# EAGLE board 1_TRYY (EAGLE 8.5.0)
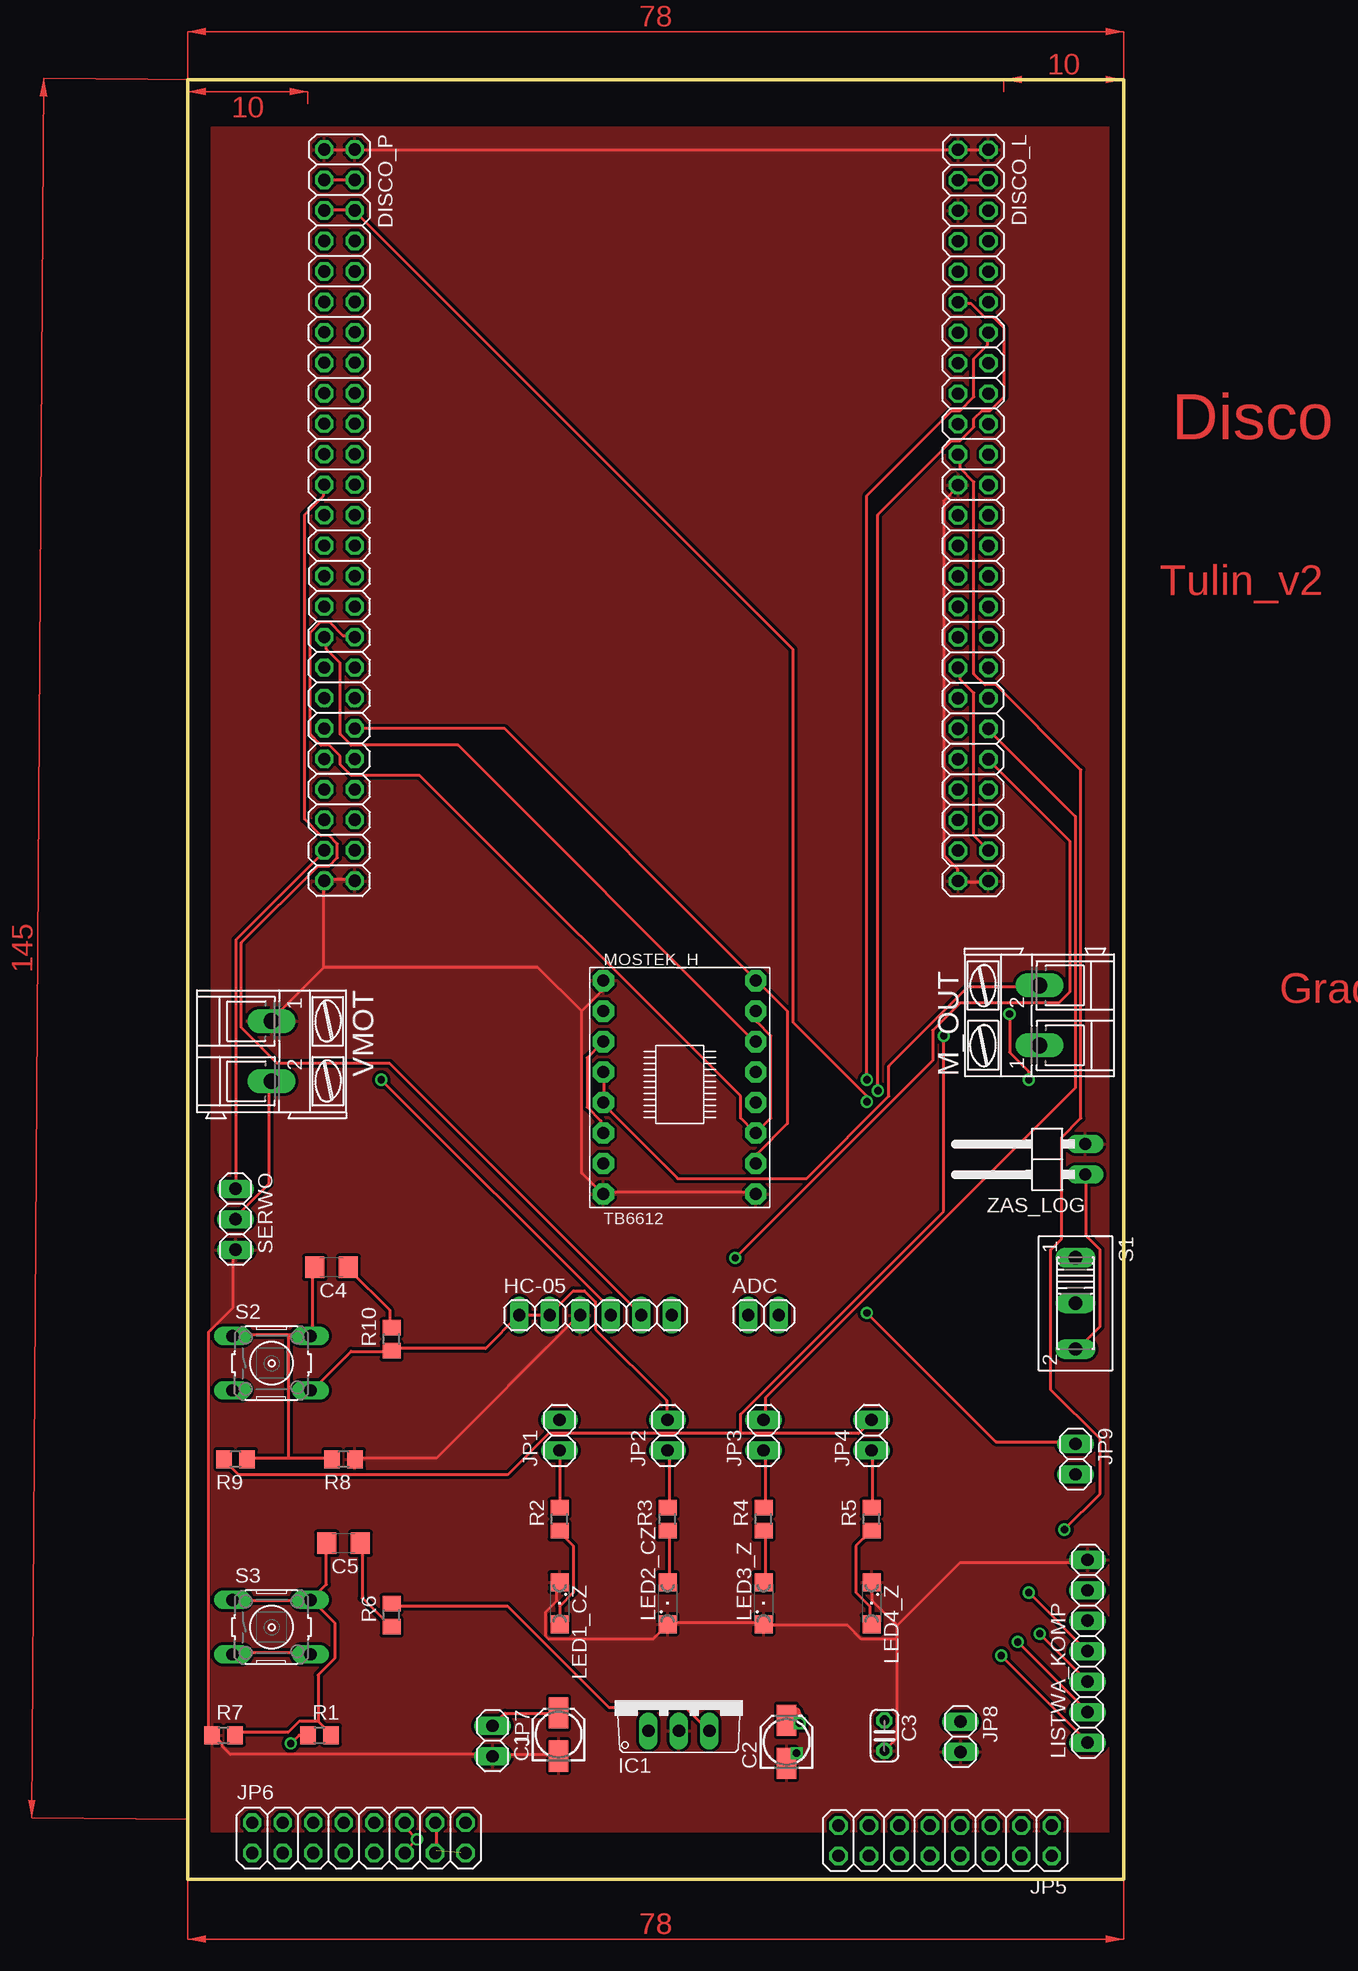
[diagram p0: board, top side]
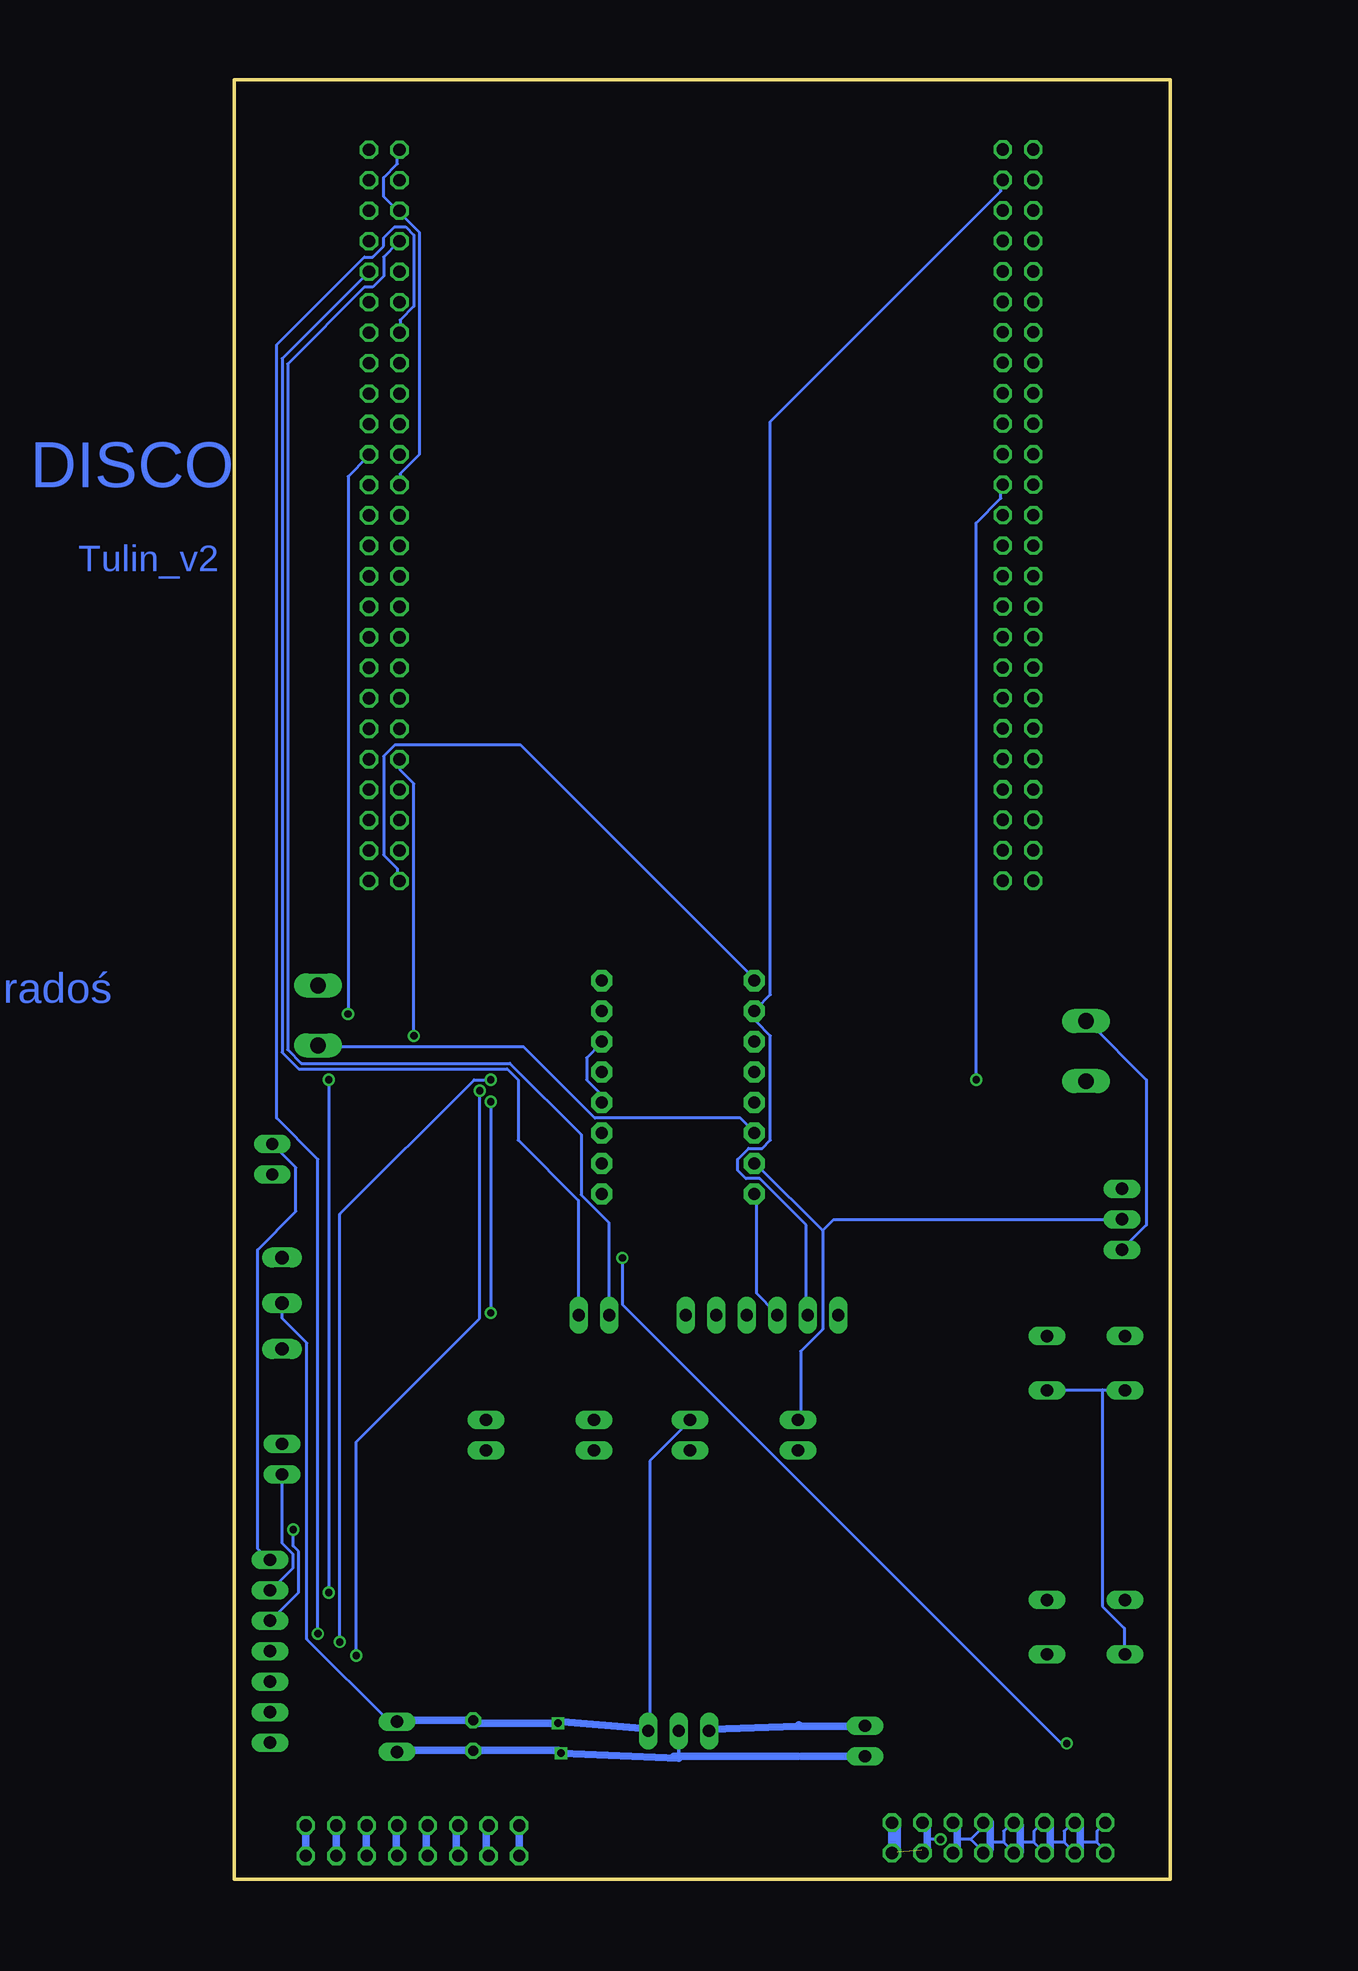
[diagram p1: board, bottom side, seen from below]

Size 78 x 150 mm. Coordinates in mm from the lower left corner, seen from the top.
Outline: 0,0 78,0 78,150 0,150 0,0
Copper layers (1*16): Top 0.035mm / dielectric 1.5mm / Bottom 0.035mm
Design rules "default": minimum track width 10mil, minimum drill 24mil, track to track 8mil, track to pad 8mil, pad to pad 8mil, via to via 8mil, smd to smd 8mil, copper to edge 40mil, drill to drill 8mil, minimum pad ring 10mil, minimum via ring 8mil, stop-mask expansion 4mil, vias tented up to drill 0mil, thermal gap 10mil

## Footprints (pad centres in the part's own frame; a part is rotated, then mirrored left to right if it is on the bottom)
1X02 = drill 1.016 long: 1 -1.27,0; 2 1.27,0
153CLV-0405 = smd 2.6 x 1.6: + 1.8,0; - -1.8,0
C025-024X044 = drill 0.813 octagon: 1 -1.27,0; 2 1.27,0
C1206 = smd 1.6 x 1.8: 1 -1.4,0; 2 1.4,0
2X25 = drill 1.016 octagon: 1 -30.48,-1.27; 2 -30.48,1.27; 3 -27.94,-1.27; 4 -27.94,1.27; 5 -25.4,-1.27; 6 -25.4,1.27; 7 -22.86,-1.27; 8 -22.86,1.27; 9 -20.32,-1.27; 10 -20.32,1.27; 11 -17.78,-1.27; 12 -17.78,1.27; 13 -15.24,-1.27; 14 -15.24,1.27; 15 -12.7,-1.27; 16 -12.7,1.27; 17 -10.16,-1.27; 18 -10.16,1.27; 19 -7.62,-1.27; 20 -7.62,1.27; 21 -5.08,-1.27; 22 -5.08,1.27; 23 -2.54,-1.27; 24 -2.54,1.27; 25 0,-1.27; 26 0,1.27; 27 2.54,-1.27; 28 2.54,1.27; 29 5.08,-1.27; 30 5.08,1.27; 31 7.62,-1.27; 32 7.62,1.27; 33 10.16,-1.27; 34 10.16,1.27; 35 12.7,-1.27; 36 12.7,1.27; 37 15.24,-1.27; 38 15.24,1.27; 39 17.78,-1.27; 40 17.78,1.27; 41 20.32,-1.27; 42 20.32,1.27; 43 22.86,-1.27; 44 22.86,1.27; 45 25.4,-1.27; 46 25.4,1.27; 47 27.94,-1.27; 48 27.94,1.27; 49 30.48,-1.27; 50 30.48,1.27
1X06 = drill 1.016 long: 1 -6.35,0; 2 -3.81,0; 3 -1.27,0; 4 1.27,0; 5 3.81,0; 6 6.35,0
TO220V = drill 1.016 long: 1 -2.54,-2.54; 2 0,-2.54; 3 2.54,-2.54
2X08 = drill 1.016 octagon: 1 -8.89,-1.27; 2 -8.89,1.27; 3 -6.35,-1.27; 4 -6.35,1.27; 5 -3.81,-1.27; 6 -3.81,1.27; 7 -1.27,-1.27; 8 -1.27,1.27; 9 1.27,-1.27; 10 1.27,1.27; 11 3.81,-1.27; 12 3.81,1.27; 13 6.35,-1.27; 14 6.35,1.27; 15 8.89,-1.27; 16 8.89,1.27
SML1206 = smd 1.5 x 1.5: A 1.75,0; C -1.75,0
1X07 = drill 1.016 long: 1 -7.62,0; 2 -5.08,0; 3 -2.54,0; 4 0,0; 5 2.54,0; 6 5.08,0; 7 7.62,0
AK300/2 = drill 1.321 long: 1 -2.515,0; 2 2.489,0
MODUL_POLOLU = drill 1 pad 1.778 octagon: A02 -6.35,1.27; AIN1 6.35,3.81; AIN2 6.35,6.35; AO1 -6.35,3.81; BIN1 6.35,-1.27; BIN2 6.35,-3.81; BO1 -6.35,-3.81; BO2 -6.35,-1.27; GND1 -6.35,8.89; GND2 -6.35,-8.89; GND3 6.35,-8.89; PWMA 6.35,8.89; PWMB 6.35,-6.35; STBY 6.35,1.27; VCC -6.35,6.35; VMOT -6.35,-6.35
R0805 = smd 1.3 x 1.5: 1 -0.95,0; 2 0.95,0
255SB = drill 1.118 long: 1 -3.81,0; 2 0,0; 3 3.81,0
B3F-10XX = drill 1.016 long: 1 -3.251,2.261; 2 3.251,2.261; 3 -3.251,-2.261; 4 3.251,-2.261
1X03 = drill 1.016 long: 1 -2.54,0; 2 0,0; 3 2.54,0
1X02/90 = drill 1.016 long: 1 -1.27,-3.81; 2 1.27,-3.81

## Placement (x,y rotation side)
ADC  [1X02]  48,47 0 top
C1  47uF  [153CLV-0405]  30.92,12.06 90 top
C2  470uF  [153CLV-0405]  49.92,11.44 90 top
C3  100nF  [C025-024X044]  58.07,11.96 270 top
C4  100n  [C1206]  12,51 180 top
C5  100n  [C1206]  13,28 180 top
DISCO_L  [2X25]  65.47,113.66 270 top
DISCO_P  [2X25]  12.66,113.69 270 top
HC-05  [1X06]  34,47 0 top
IC1  786TV  [TO220V]  40.95,14.89 0 top
JP1  [1X02]  31,37 90 top
JP2  [1X02]  40,37 90 top
JP3  [1X02]  48,37 90 top
JP4  [1X02]  57,37 90 top
JP5  [2X08]  63.13,3.2 180 top
JP6  [2X08]  14.28,3.44 0 top
JP7  [1X02]  25.42,11.51 270 top
JP8  [1X02]  64.42,11.86 270 top
JP9  [1X02]  74,35 270 top
LED1_CZ  [SML1206]  31,23 270 top
LED2_CZ  [SML1206]  40,23 90 top
LED3_Z  [SML1206]  48,23 90 top
LED4_Z  [SML1206]  57,23 270 top
LISTWA_KOMP  [1X07]  75,19 90 top
M_OUT  [AK300/2]  71,72 90 top
MOSTEK_H  MODUL_POLOLU  [MODUL_POLOLU]  41,66 0 top
R1  330  [R0805]  11,12 0 top
R2  300  [R0805]  31,30 90 top
R3  150  [R0805]  40,30 90 top
R4  51  [R0805]  48,30 90 top
R5  51  [R0805]  57,30 90 top
R6  100  [R0805]  17,22 90 top
R7  220k  [R0805]  3,12 0 top
R8  220k  [R0805]  13,35 180 top
R9  330  [R0805]  4,35 180 top
R10  100  [R0805]  17,45 90 top
S1  [255SB]  74,48 270 top
S2  [B3F-10XX]  7,43 0 top
S3  [B3F-10XX]  7,21 0 top
SERWO  [1X03]  4,55 270 top
VMOT  [AK300/2]  7,69 270 top
ZAS_LOG  [1X02/90]  71,60 90 top

## Library data of the parts
ADC DISCO_L DISCO_P HC-05 JP1-JP9 LISTWA_KOMP SERWO ZAS_LOG = pinhead
C1-C3 = rcl
C4 C5 = rcl; SPICEPREFIX: C
IC1 = linear
LED1_CZ LED2_CZ LED3_Z LED4_Z = led
M_OUT VMOT = con-ptr500; OC_FARNELL: unknown; OC_NEWARK: unknown
MOSTEK_H = TB6612FNG
R1-R10 = rcl; SPICEPREFIX: R
S1 = switch
S2 S3 = switch-omron; MPN: B3F-1000; OC_FARNELL: 176432; OC_NEWARK: 36M3542

## Nets
3V: DISCO_P.5 DISCO_P.6 JP9.1
5V: C2.+ C3.1 DISCO_P.3 DISCO_P.4 HC-05.1 HC-05.2 IC1.3 JP2.2 JP8.1 MOSTEK_H.VCC R6.2 R10.1 S1.2 S2.3 S2.4 S3.3 S3.4
A: JP9.2 LISTWA_KOMP.6
BOOT0: DISCO_P.21
GND: C1.- C2.- C3.2 DISCO_L.1 DISCO_L.2 DISCO_L.5 DISCO_L.23 DISCO_L.49 DISCO_L.50 DISCO_P.1 DISCO_P.2 DISCO_P.49 DISCO_P.50 HC-05.3 IC1.2 JP7.2 JP8.2 LED1_CZ.C LED2_CZ.C LED3_Z.C LED4_Z.C LISTWA_KOMP.7 MOSTEK_H.GND1 MOSTEK_H.GND2 MOSTEK_H.GND3 R7.1 R8.1 SERWO.3 VMOT.1 ZAS_LOG.2
M_OUT_1: M_OUT.1 MOSTEK_H.AO1 MOSTEK_H.BO1
M_OUT_2: M_OUT.2 MOSTEK_H.A02 MOSTEK_H.BO2
N$1: JP5.1 JP5.2
N$2: JP5.3 JP5.4
N$3: JP5.5 JP5.6
N$4: JP5.7 JP5.8
N$5: JP5.9 JP5.10
N$6: JP5.11 JP5.12
N$7: JP5.13 JP5.14
N$8: JP5.15 JP5.16
N$9: JP6.1 JP6.2
N$10: JP6.3 JP6.4
N$11: JP6.5 JP6.6
N$12: JP6.7 JP6.8
N$13: JP6.9 JP6.10
N$14: JP6.11 JP6.12
N$15: JP6.13 JP6.14
N$16: JP6.15 JP6.16
N$17: C1.+ IC1.1 JP7.1
N$18: S1.3 ZAS_LOG.1
N$19: LED1_CZ.A R2.1
N$20: LED2_CZ.A R3.1
N$21: C4.2 R8.2 R9.1 S2.1 S2.2
N$22: JP1.1 R2.2
N$23: C5.2 R1.2 R7.2 S3.1 S3.2
N$24: JP2.1 R3.2
N$25: LED3_Z.A R4.1
N$26: JP3.1 R4.2
N$27: C4.1 R10.2
N$28: C5.1 R6.1
N$29: LED4_Z.A R5.1
N$30: JP4.1 R5.2
N$56: MOSTEK_H.STBY
NC: DISCO_L.35 DISCO_L.48
NRST: DISCO_L.6
PA0: DISCO_L.12
PA1: DISCO_L.11 LISTWA_KOMP.1
PA2: DISCO_L.14 LISTWA_KOMP.2
PA3: DISCO_L.13 LISTWA_KOMP.3
PA4: DISCO_L.16
PA5: DISCO_L.15
PA6: DISCO_L.18
PA7: DISCO_L.17
PA8: DISCO_P.43
PA9: DISCO_P.44
PA10: DISCO_P.41
PA13: DISCO_P.42
PA14: DISCO_P.39
PA15: DISCO_P.40 MOSTEK_H.PWMA MOSTEK_H.PWMB
PB0: DISCO_L.22 LISTWA_KOMP.4
PB1: DISCO_L.21 LISTWA_KOMP.5
PB2: DISCO_L.24
PB3: DISCO_P.28
PB4: DISCO_P.25
PB5: DISCO_P.26
PB6: DISCO_P.23 HC-05.5
PB7: DISCO_P.24 HC-05.4
PB8: DISCO_P.19
PB9: DISCO_P.20
PB10: DISCO_L.34
PB12: DISCO_L.36
PB13: DISCO_L.37
PB14: DISCO_L.38
PB15: DISCO_L.39
PC0: DISCO_L.8
PC1: ADC.1 DISCO_L.7
PC2: ADC.2 DISCO_L.10
PC3: DISCO_L.9
PC4: DISCO_L.20
PC5: DISCO_L.19
PC6: DISCO_P.47 SERWO.1
PC7: DISCO_P.48
PC8: DISCO_P.45
PC9: DISCO_P.46
PC10: DISCO_P.37
PC11: DISCO_P.38
PC12: DISCO_P.35
PC13: DISCO_P.12
PC14: DISCO_P.9
PC15: DISCO_P.10
PD0: DISCO_P.36
PD1: DISCO_P.33 MOSTEK_H.AIN1 MOSTEK_H.BIN1
PD2: DISCO_P.34 MOSTEK_H.AIN2 MOSTEK_H.BIN2
PD3: DISCO_P.31
PD4: DISCO_P.32
PD5: DISCO_P.29
PD6: DISCO_P.30
PD7: DISCO_P.27
PD8: DISCO_L.40 JP3.2
PD9: DISCO_L.41 JP4.2 R9.2
PD10: DISCO_L.42 R1.1
PD11: DISCO_L.43
PD12: DISCO_L.44
PD13: DISCO_L.45
PD14: DISCO_L.46
PD15: DISCO_L.47
PE0: DISCO_P.17
PE1: DISCO_P.18
PE2: DISCO_P.15
PE3: DISCO_P.16
PE4: DISCO_P.13
PE5: DISCO_P.14
PE6: DISCO_P.11
PE7: DISCO_L.25
PE8: DISCO_L.26
PE9: DISCO_L.27
PE10: DISCO_L.28
PE11: DISCO_L.29
PE12: DISCO_L.30
PE13: DISCO_L.31
PE14: DISCO_L.32
PE15: DISCO_L.33
PH0: DISCO_P.7
PH1: DISCO_P.8
VDD: DISCO_L.3 DISCO_L.4
VDDA: DISCO_P.22
VMOT: JP1.2 MOSTEK_H.VMOT SERWO.2 VMOT.2

## Tracks (layer width: path | path; a pad name or v marks a point on that pad's centre or on a via)
3V  (via drill 0.61)
  Top 0.254: DISCO_P.5 11.58,139.09 13.86,139.09 DISCO_P.6 14.09,138.87 50.44,102.52 50.44,71.43 56.61,65.26 v56.61,64.8 | v56.61,47.2 67.35,36.45 73.98,36.45 JP9.1
  Bottom 0.254: v56.61,64.8 v56.61,47.2
5V  (via drill 0.6)
  Top 0.254: R6.2 17.06,22.74 26.66,22.74 35.12,14.28 41.52,14.28 43.35,12.45 IC1.3 | S3.3 3.8,18.85 10.2,18.85 S3.4 | S2.4 10.43,40.8 13.63,44 16.83,44 R10.1 17.06,44.23 24.84,44.23 27.58,46.97 HC-05.1 27.81,46.97 30.09,46.97 HC-05.2 30.32,47.2 32.15,49.03 33.06,49.03 33.98,48.11 33.98,45.83 39.92,39.88 39.92,38.28 JP2.2 | DISCO_P.3 11.58,141.61 13.86,141.61 DISCO_P.4
  Top 0.61: v51,13 C2.+ 50.75,14 51.1,13.15
  Bottom 0.254: 58.25,13.25 58.21,13.37 C3.1 58.21,13.14 58,13 | v51,13 51.12,13.14 51.1,13.15 | 64.25,13.25 64.38,13.14 JP8.1 64.61,13.14 65.07,13.14 71.93,19.99 71.93,44.68 73.98,46.74 73.98,47.88 S1.2 | 43.58,12.51 43.58,12.45 IC1.3 43.35,12.68 43.35,34.85 40.15,38.05 JP2.2 | 5.63,40.8 10.2,40.8 S2.4 | 5.63,40.8 3.8,40.8 S2.3 | 5.63,40.8 5.63,22.74 3.8,20.91 3.8,18.85 S3.3 | HC-05.2 30.32,47.2 30.32,54.51 34.21,58.4 35.35,58.4 36.04,59.09 36.04,60 35.12,60.91 33.98,60.91 33.29,61.6 33.29,70.29 34.44,71.43 34.44,72.34 MOSTEK_H.VCC 34.44,72.57 33.29,73.72 33.29,121.49 14.09,140.69 14.09,141.61 DISCO_P.4
  Bottom 0.61: 51.1,13.15 43.58,12.51 43.5,12.5 | 58.25,13.25 64.25,13.25 | 58,13 v51,13
A
  Bottom 0.254: JP9.2 73.98,33.71 73.98,27.99 73.07,27.08 73.07,25.94 74.9,24.11 LISTWA_KOMP.6
GND  (via drill 0.6)
  Top 0.254: DISCO_P.1 11.58,144.12 13.86,144.12 DISCO_P.2 14.09,144.12 64.15,144.12 DISCO_L.1 64.38,144.12 66.67,144.12 DISCO_L.2 | DISCO_L.50 66.67,83.09 64.38,83.09 DISCO_L.49 64.15,83.32 64.15,84.23 63.01,85.37 63.01,114.86 64.15,116.01 DISCO_L.23 | DISCO_P.50 13.86,83.32 11.58,83.32 DISCO_P.49 11.35,83.09 11.35,76 | 11.35,76 7,71.66 VMOT.1 | R8.1 14.09,35.08 20.72,35.08 32.61,46.97 HC-05.3 | 32.84,72.34 34.44,73.94 34.44,74.86 MOSTEK_H.GND1 | 32.84,72.34 32.84,58.86 34.44,57.26 MOSTEK_H.GND2 34.66,57.26 47.24,57.26 MOSTEK_H.GND3 | 11.35,76 29.18,76 32.84,72.34 | C1.- 30.78,10.39 25.52,10.39 JP7.2 25.29,10.39 3.57,10.39 2.89,11.08 2.89,11.31 2.2,11.99 R7.1 1.98,12.22 1.75,12.45 1.75,45.6 3.8,47.66 3.8,52.45 SERWO.3 | LED1_CZ.C 30.78,24.57 30.78,23.19 29.86,22.28 29.86,20.22 30.09,19.99 38.78,19.99 39.92,21.14 LED2_CZ.C 40.15,21.37 47.92,21.37 LED3_Z.C 48.15,21.14 55.01,21.14 56.15,19.99 59.12,19.99 | 59.12,21.14 57.07,23.19 57.07,24.57 LED4_Z.C | 59.12,19.99 59.12,11.76 58.21,10.85 C3.2 | 59.12,19.99 59.12,21.14 | 59.12,21.14 64.38,26.4 74.9,26.4 LISTWA_KOMP.7
  Top 0.61: v50.75,10.5 C2.-
  Bottom 0.254: DISCO_L.23 64.15,116.23 64.15,117.15 62.55,118.75 62.55,137.27 64.15,138.87 DISCO_L.5 64.38,139.09 65.53,140.24 65.53,141.84 64.38,142.98 64.38,144.12 DISCO_L.1 | SERWO.3 3.8,52.68 1.98,54.51 1.98,66.63 6.77,71.43 VMOT.1 | MOSTEK_H.GND2 34.44,57.03 34.44,48.8 32.84,47.2 HC-05.3 | 30.75,10.25 30.78,10.16 31,10.25 | 40.61,10.25 40.61,10.16 40.75,10.25 | IC1.2 41.06,12.22 41,12.22 | 58.25,10.75 58.21,10.85 C3.2 57.98,10.85 57.98,10.75 | JP8.2 64.38,10.62 64.25,10.75 | ZAS_LOG.2 74.67,61.14 72.84,59.31 72.84,55.66 76.04,52.45 76.04,27.54 75.13,26.62 LISTWA_KOMP.7 | v50.75,10.5 50.89,10.62 51,10.75 | JP7.2 25.52,10.16 25.52,10.25 | DISCO_L.49 64.38,83.32 64.38,84.23 65.53,85.37 65.53,93.6 64.61,94.52 54.1,94.52 34.66,75.09 MOSTEK_H.GND1
  Bottom 0.305: 41,12.25 41,12.22 40.94,10.08 41,10.25
  Bottom 0.61: 58,10.75 57.98,10.75 51,10.75 | 58.25,10.75 64.25,10.75 | 25.5,10.25 25.52,10.25 30.75,10.25 | 31,10.25 40.61,10.25 40.75,10.25 41,10.25 41.37,10.25 | 40.94,10.08 v50.75,10.5
  pour Top (isolate 0.254): 2,146 77,146 77,139 77,4 76,4 2,4 2,5 2,146
M_OUT_1
  Top 0.254: MOSTEK_H.BO1 34.44,62.28 34.44,63.2 33.29,64.34 33.29,68.46 34.44,69.6 MOSTEK_H.AO1
  Bottom 0.254: M_OUT.1 70.78,69.37 53.87,69.37 47.92,63.43 35.81,63.43 34.66,62.28 MOSTEK_H.BO1
M_OUT_2
  Top 0.254: MOSTEK_H.A02 34.66,67.09 34.66,64.8 MOSTEK_H.BO2 34.66,64.57 40.84,58.4 51.58,58.4 58.44,65.26 58.44,67.77 65.07,74.4 70.78,74.4 M_OUT.2
N$1
  Bottom 0.61: JP5.2 JP5.1
N$2
  Bottom 0.254: 69.5,2 69.64,1.94 JP5.4 | 69.5,4.25 69.64,4.45 JP5.3
  Bottom 0.61: 69.5,4.25 69.5,2
N$3
  Bottom 0.254: 67,2 67.13,1.94 JP5.6 | 67,4.25 67.13,4.45 JP5.5
  Bottom 0.61: 67,4.25 67,2
N$4
  Bottom 0.254: 64.5,2 64.61,1.94 JP5.8 | 64.5,4.25 64.61,4.45 JP5.7
  Bottom 0.61: 64.5,4.25 64.5,2
N$5
  Bottom 0.254: 62,2 JP5.10 | 62,4.25 61.87,4.45 JP5.9
  Bottom 0.61: 62,4.25 62,2
N$6
  Bottom 0.254: 59.5,2 59.35,1.94 JP5.12 | 59.5,4.25 59.35,4.45 JP5.11
  Bottom 0.61: 59.5,4.25 59.5,2
N$7
  Bottom 0.254: 57,2 56.84,1.94 JP5.14 | 57,4.25 56.84,4.45 JP5.13
  Bottom 0.61: 57,4.25 57,2
N$8
  Bottom 0.254: 54.25,2 54.32,1.94 JP5.16 | 54.25,4.25 54.32,4.45 JP5.15
  Bottom 0.61: 54.25,4.25 54.25,2
N$9
  Bottom 0.254: 6.09,3.08 7.5,3.08 | 6.09,3.08 5.4,2.39 JP6.1 | 6.09,3.08 6.09,3.99 5.4,4.68 JP6.2
  Bottom 0.61: 7.5,4.5 7.5,3.08 7.5,2.25
N$10
  Bottom 0.254: 8.83,3.08 10,3.08 | 8.83,3.08 8.15,2.39 JP6.3 | 8.83,3.08 8.83,3.99 8.15,4.68 JP6.4
  Bottom 0.61: 10,4.5 10,3.08 10,2.25
N$11
  Bottom 0.254: 11.35,3.08 12.5,3.08 | 11.35,3.08 10.66,2.39 JP6.5 | 11.35,3.08 11.35,3.99 10.66,4.68 JP6.6
  Bottom 0.61: 12.5,4.5 12.5,3.08 12.5,2.25
N$12
  Bottom 0.254: 13.86,3.08 15,3.08 | 13.86,3.08 13.18,2.39 JP6.7 | 13.86,3.08 13.86,3.99 13.18,4.68 JP6.8
  Bottom 0.61: 15,2.5 15,3.08 15,4.75
N$13
  Bottom 0.254: 16.6,3.31 17.75,3.31 | 16.6,3.31 15.69,2.39 JP6.9 | 16.6,3.31 15.69,4.22 15.69,4.68 JP6.10
  Bottom 0.61: 17.75,4.5 17.75,3.31 17.75,2.25
N$14  (via drill 0.61)
  Top 0.254: JP6.11 18.2,2.39 v19.12,3.31 18.2,4.22 18.2,4.68 JP6.12
  Bottom 0.254: v19.12,3.31 20.25,3.31
  Bottom 0.61: 20.25,4.5 20.25,3.31 20.25,2.25
N$15  (1 unrouted)
  Top 0.254: JP6.13 20.72,2.39 20.72,4.68 JP6.14
  Bottom 0.61: 22.75,4.5 22.75,2.25
N$16
  Bottom 0.61: JP6.15 JP6.16
N$17
  Top 0.254: C1.+ 30.78,13.82 26.44,13.82 25.52,12.91 JP7.1
  Bottom 0.254: 30.92,12.86 31.01,12.91 31,12.73 | 38.25,12.5 38.32,12.45 IC1.1 | 25.52,12.75 25.52,12.68 JP7.1
  Bottom 0.61: 25.5,12.75 25.52,12.75 30.75,12.75 30.92,12.86 | 30.83,12.73 31,12.73 38.25,12.5
N$18
  Top 0.254: ZAS_LOG.1 74.9,58.63 74.9,53.6 76.04,52.45 76.04,46.05 74.21,44.23 S1.3
N$19
  Top 0.254: LED1_CZ.A 31.01,21.37 31.01,22.74 32.15,23.88 32.15,27.77 31.01,28.91 R2.1
N$20
  Top 0.254: LED2_CZ.A 40.15,24.8 40.15,28.91 R3.1
N$21
  Top 0.254: 8.38,35.08 12.03,35.08 R8.2 | 8.38,35.08 5.18,35.08 R9.1 | C4.2 10.43,50.86 10.43,45.37 S2.2 10.2,45.37 8.38,45.37 | 8.38,45.37 3.8,45.37 S2.1 | 8.38,45.37 8.38,35.08
N$22
  Top 0.254: R2.2 31.01,30.97 31.01,35.54 JP1.1
N$23
  Top 0.254: 10.89,13.14 9.29,13.14 8.38,12.22 4.03,12.22 R7.2 | 10.89,13.14 11.8,12.22 R1.2 | C5.2 11.58,27.99 11.58,24.57 10.43,23.42 S3.2 | S3.1 3.8,23.19 10.2,23.19 S3.2 | 10.89,13.14 10.89,17.02 12.26,18.39 12.26,21.37 10.43,23.19 S3.2
N$24
  Top 0.254: R3.2 40.15,30.97 40.15,35.54 JP2.1
N$25
  Top 0.254: LED3_Z.A 48.15,24.8 48.15,28.91 R4.1
N$26
  Top 0.254: R4.2 48.15,30.97 48.15,35.54 JP3.1
N$27
  Top 0.254: R10.2 16.83,46.05 16.83,47.43 13.41,50.86 C4.1
N$28
  Top 0.254: R6.1 16.83,21.14 14.55,23.42 14.55,27.99 C5.1
N$29
  Top 0.254: LED4_Z.A 56.84,21.37 56.84,22.74 55.7,23.88 55.7,27.77 56.84,28.91 R5.1
N$30
  Top 0.254: R5.2 57.07,30.97 57.07,35.54 JP4.1
NC
  Top 0.254: DISCO_L.35 64.38,100.92 64.38,100 65.53,98.86 65.53,86.97 66.67,85.83 DISCO_L.48
PA1  (via drill 0.61)
  Top 0.254: v57.53,65.71 57.53,113.72 63.7,119.89 64.38,119.89 65.53,121.03 65.53,121.72 66.21,122.41 66.9,122.41 68.04,123.55 68.04,129.26 67.13,130.18 66.44,130.18 65.3,131.32 64.38,131.32 DISCO_L.11 | v67.81,18.62 74.9,11.54 LISTWA_KOMP.1
  Bottom 0.254: v57.53,65.71 57.53,46.74 67.81,36.45 v67.81,18.62
PA2  (via drill 0.61)
  Top 0.254: v56.61,66.63 56.61,115.32 63.7,122.41 64.38,122.41 65.53,123.55 65.53,126.75 66.67,127.89 66.67,128.81 DISCO_L.14 | v69.18,19.77 74.9,14.05 LISTWA_KOMP.2
  Bottom 0.254: v56.61,66.63 57.98,66.63 69.18,55.43 v69.18,19.77
PA3  (via drill 0.61)
  Top 0.254: v71.01,20.45 74.9,16.56 LISTWA_KOMP.3
  Bottom 0.254: v71.01,20.45 71.01,60 74.44,63.43 74.44,127.89 67.13,135.21 66.44,135.21 65.53,136.12 65.53,136.81 64.61,137.72 63.7,137.72 63.01,137.04 63.01,131.09 64.15,129.95 64.15,129.04 DISCO_L.13
PA15
  Top 0.254: DISCO_P.40 14.09,95.89 26.44,95.89 47.24,75.09 MOSTEK_H.PWMA 47.47,74.86 49.98,72.34 49.98,62.97 47.47,60.46 47.47,59.77 MOSTEK_H.PWMB
PB0  (via drill 0.61)
  Top 0.254: v70.1,23.88 74.9,19.08 LISTWA_KOMP.4 | v70.1,66.63 70.1,67.31 68.5,68.91 v68.5,72.11
  Bottom 0.254: v70.1,66.63 v70.1,23.88 | v68.5,72.11 68.5,116.92 66.9,118.52 DISCO_L.22
PB1  (via drill 0.61)
  Top 0.254: v73.07,29.14 76.04,32.11 76.04,36.68 71.93,40.8 71.93,52.45 72.84,53.37 72.84,61.83 74.44,63.43 74.44,92.46 67.35,99.55 66.44,99.55 65.53,100.46 65.53,116.46 64.38,117.61 64.38,118.52 DISCO_L.21
  Bottom 0.254: v73.07,29.14 73.07,27.77 72.61,27.31 72.61,23.88 74.9,21.59 LISTWA_KOMP.5
PB6
  Top 0.254: DISCO_P.23 11.35,116.01 11.35,115.32 9.75,113.72 9.75,88.34 11.12,86.97 11.8,86.97 12.49,86.29 12.49,85.14 11.8,84.46 10.89,84.46 4.49,78.06 4.49,70.97 7.46,68 16.83,68 37.64,47.2 HC-05.5
PB7  (via drill 0.61)
  Top 0.254: v16.15,66.63 35.12,47.66 35.12,47.2 HC-05.4
  Bottom 0.254: v16.15,66.63 16.15,113.03 14.09,115.09 14.09,116.01 DISCO_P.24
PC1
  Bottom 0.254: ADC.1 46.78,47.2 46.78,54.74 49.07,57.03 49.07,62.06 55.01,68 72.38,68 73.53,69.14 73.53,126.29 67.13,132.69 66.44,132.69 65.53,133.61 65.53,135.21 64.38,136.35 DISCO_L.7
PC2
  Bottom 0.254: ADC.2 49.3,47.2 49.3,56.57 54.32,61.6 54.32,66.63 55.24,67.54 72.61,67.54 73.98,68.91 73.98,126.75 66.9,133.84 DISCO_L.10
PC6
  Top 0.254: SERWO.1 4.03,57.71 4.03,78.29 11.35,85.6 DISCO_P.47
PD1
  Top 0.254: DISCO_P.33 11.58,103.43 11.58,102.52 12.72,101.38 12.72,95.43 13.63,94.52 22.55,94.52 47.24,69.83 MOSTEK_H.AIN1
  Bottom 0.254: MOSTEK_H.BIN1 47.47,64.8 47.47,65.48 48.61,66.63 48.61,68.46 47.47,69.6 MOSTEK_H.AIN1
PD2
  Top 0.254: DISCO_P.34 13.86,103.66 12.95,103.66 11.8,104.81 11.12,104.81 10.2,103.89 10.2,95.43 11.12,94.52 11.8,94.52 12.72,93.6 12.72,92.92 13.63,92 19.35,92 46.09,65.26 46.09,63.43 47.24,62.28 MOSTEK_H.BIN2 47.47,62.28 48.61,63.43 48.61,70.29 47.47,71.43 47.47,72.34 MOSTEK_H.AIN2
PD8
  Top 0.254: JP3.2 48.15,38.28 48.15,40.11 73.98,65.94 73.98,88.57 66.9,95.66 DISCO_L.40
PD9  (via drill 0.61)
  Top 0.254: 46.09,37.14 55.92,37.14 56.84,38.05 JP4.2 | 46.09,37.14 30.09,37.14 26.66,33.71 4.26,33.71 3.12,34.85 R9.2 | v63.01,70.29 63.01,55.66 46.09,38.74 46.09,37.14
  Bottom 0.254: v63.01,70.29 63.01,91.32 64.15,92.46 64.15,93.15 DISCO_L.41
PD10  (via drill 0.61)
  Top 0.254: v8.6,11.31 9.29,11.99 9.98,11.99 R1.1 | v45.64,51.77 62.1,68.23 62.1,70.74 64.38,73.03 72.61,73.03 73.53,73.94 73.53,86.52 66.9,93.15 DISCO_L.42
  Bottom 0.254: v8.6,11.31 9.06,11.31 45.64,47.88 v45.64,51.77
VDD
  Top 0.254: DISCO_L.3 64.38,141.61 66.67,141.61 DISCO_L.4
VMOT
  Top 0.254: SERWO.2 4.03,55.2 6.77,57.94 6.77,66.4 VMOT.2
  Bottom 0.254: 28.95,54.05 28.95,45.83 30.78,44 30.78,38.28 JP1.2 | 28.95,54.05 34.44,59.54 MOSTEK_H.VMOT | 28.95,54.05 28.03,54.97 4.03,54.97 SERWO.2
(copper drawn outside any net)
  shapes: Top area x6

## Text on the board
Top: Disco | Tulin_v2 | Gradoś | H
Bottom: DISCO | Tulin_v2 | Gradoś | H